# Altium PCB TP3_PCB.PcbDoc
Units mm, origin at the board's own origin, x right, y up, seen from the top; angles counter-clockwise.
Board outline 41.1 x 58.6 mm, 2 copper layers (Top Layer, Bottom Layer); 36 components, 23 nets, 142 pads, 38 vias.
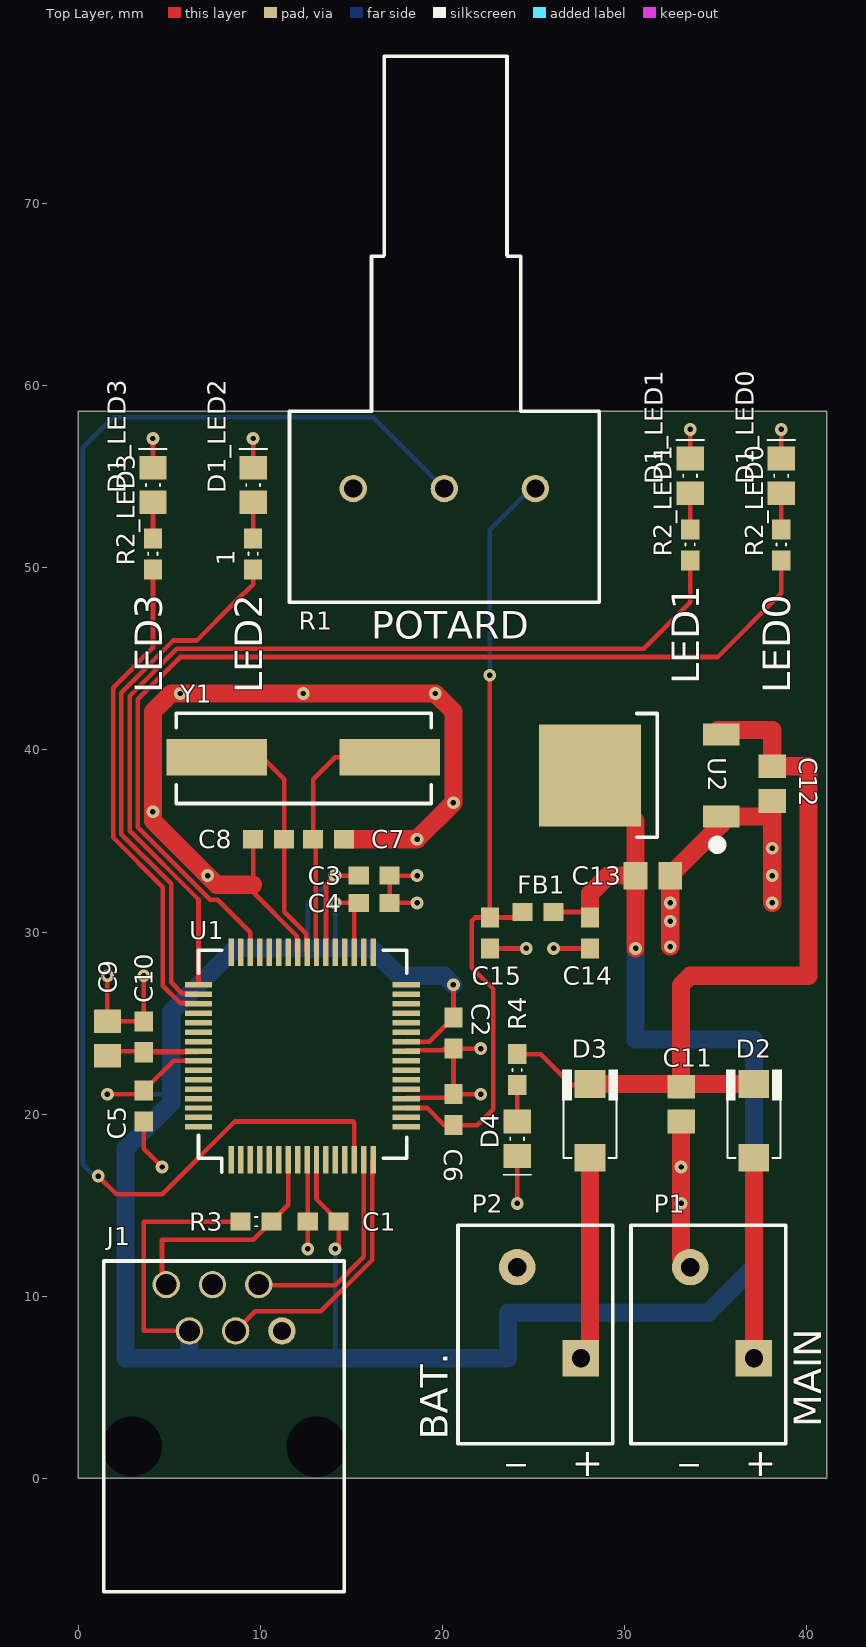
[diagram p0: Top Layer view]
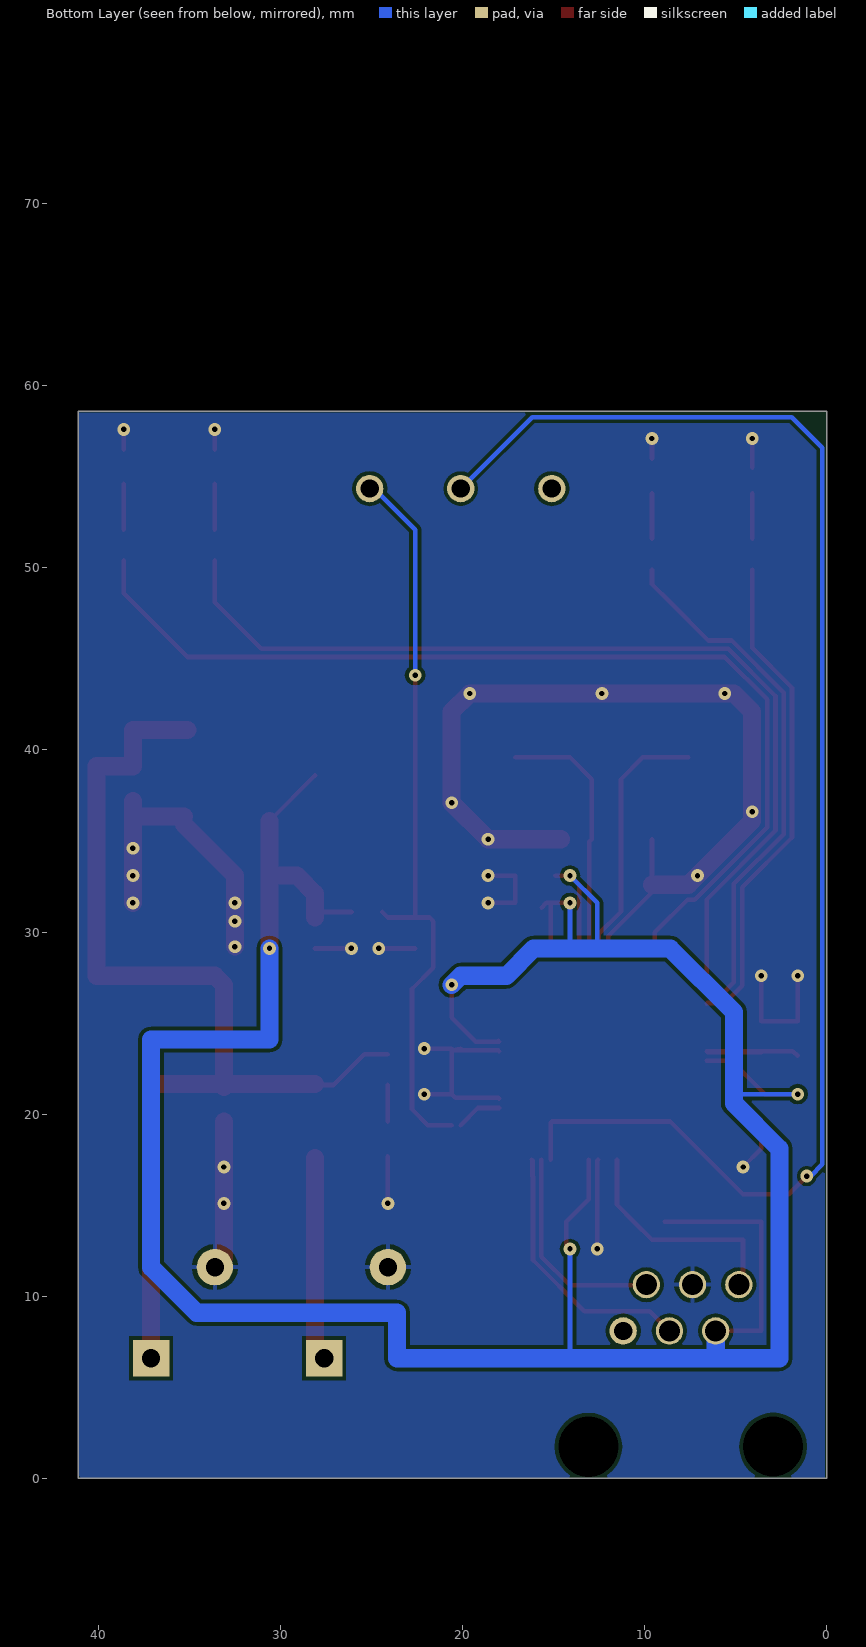
[diagram p1: Bottom Layer view, seen from below]

## Layer stack, top to bottom
Top Solder: solder mask 0.0102, Solder Resist, Dk 3.5
Top Layer: signal copper 0.0356
Dielectric 1: dielectric 0.32, FR-4, Dk 4.8
Bottom Layer: signal copper 0.0356
Bottom Solder: solder mask 0.0102, Solder Resist, Dk 3.5

## Board outline
0.2,0 41.1,0 41.1,58.6 0,58.6 0,0.2 0,0

## Design rules (kind name [scope] priority, off if disabled: settings)
Clearance [All] p1: gap=0.2
HoleSize [All] p1: absolutevalues=TRUE maxlimit=3 minlimit=0.3 maxpercent=80.000 minpercent=20.000
PolygonConnect isvia [IsVia] p1: connectstyle=Direct reliefconductorwidth=0.254 reliefentries=4 polygonreliefangle="90 Angle" airgapwidth=0.254
PolygonConnect all [All] p2: connectstyle=Relief reliefconductorwidth=0.254 reliefentries=4 polygonreliefangle="90 Angle" airgapwidth=0.254
RoutingVias [All] p1: holewidth=1 width=1 viastyle="Through Hole" minholewidth=0.3 minwidth=0.7 maxholewidth=3 maxwidth=3
SolderMaskExpansion [All] p1: expansion=0.102
UnpouredPolygon [All] p1: allowunpoured=FALSE
Width [All] p1: maxlimit=3 minlimit=0.2 preferedwidth=0.25
28 further rules are at their usual default settings.

## Classes and differential pairs
channel class led: LED0 LED1 LED2 LED3
component class TP2: R1
component class POWER: C11 C12 C13 C14 C15 D2 D3 D4 FB1 P1 P2 R4 U2
component class PIC: C1 C2 C3 C4 C5 C6 C7 C8 C9 C10 J1 R3 U1 Y1
component class LED3: D1_LED3 R2_LED3
component class LED2: 1 D1_LED2 R2_LED2
component class LED1: D1_LED1 R2_LED1
component class LED0: D1_LED0 R2_LED0

## Components (designator, comment, footprint, x,y, rotation, side; value= is the part's Value field where it differs from the comment)
1 "330r" RESC1608N 9.6,51.6 r270 top (schematic designator R2)
C1 "100nF" CAPC1608N 12.6,14.1 r0 top
C2 "100nF" CAPC1608N 20.6,23.6 r90 top
C3 "100nF" CAPC1608N 17.1,33.1 r180 top
C4 "100nF" CAPC1608N 17.1,31.6 r180 top
C5 "100nF" CAPC1608N 3.6,19.6 r90 top
C6 "100nF" CAPC1608N 20.6,21.1 r270 top
C7 "20pF" CAPC1608N 14.6,35.1 r180 top
C8 "20pF" CAPC1608N 9.6,35.1 r0 top
C9 "10uF 6.3V" CAPC2012N 1.6,25.1 r270 top
C10 "1uF 6.3V" CAPC1608N 3.6,25.1 r270 top
C11 "10uF 6.3V" CAPC2012N 33.1,19.6 r90 top
C12 "10uF 6.3V" CAPC2012N 38.1,39.1 r270 top
C13 "10uF 6.3V" CAPC2012N 30.6,33.1 r0 top
C14 "1uF 6.3V" CAPC1608N 28.1,29.1 r90 top
C15 "100nF" CAPC1608N 22.6,29.1 r90 top
D1_LED0 "Green LED" "LED 0805" 38.6,54.1 r90 top (schematic designator D1)
D1_LED1 "Green LED" "LED 0805" 33.6,54.1 r90 top (schematic designator D1)
D1_LED2 "Green LED" "LED 0805" 9.6,53.6 r90 top (schematic designator D1)
D1_LED3 "Green LED" "LED 0805" 4.1,53.6 r90 top (schematic designator D1)
D2 "GF1A" SMA/DO-214AC_21 37.1,17.6 r90 top
D3 "GF1A" SMA/DO-214AC_21 28.1,17.6 r90 top
D4 "Green LED" "LED 0805" 24.1,19.6 r270 top
FB1 "600r" INDC1608AN 26.1,31.1 r180 top
J1 "Program / Debug" RJ12_90 6.1,8.1 r0 top
P1 "12V Main" PHOENIX_1985195 37.1,6.6 r0 top
P2 "12V Battery" PHOENIX_1985195 27.6,6.6 r0 top
R1 "1K" PDB181-K415K-102A2 11.6,47.1 r0 top
R2_LED0 "330r" RESC1608N 38.6,52.1 r270 top (schematic designator R2)
R2_LED1 "330r" RESC1608N 33.6,52.1 r270 top (schematic designator R2)
R2_LED3 "330r" RESC1608N 4.1,51.6 r270 top (schematic designator R2)
R3 "4.7k" RESC1608N 10.6,14.1 r180 top
R4 "470r" RESC1608N 24.1,21.6 r90 top
U1 "PIC32MX764F128H-I/PT" QFP50P1200X1200X120-64 6.6,27.1 r0 top
U2 "AP1117" TD03B_N 28.1,38.6 r90 top
Y1 "8MHz" "HC49/4H SMX CRYSTAL" 17.1,39.6 r180 top

## Footprints (in the part's own frame and the unit in brackets; to place one, negate y for a bottom-side part, rotate by r counter-clockwise, add the part's x,y. Pads: shape width x height; smd on the part's side, far side on the other; paste and mask are expansions set on the pad)
CAPC1608N [mm]
  rect 1.1x1 smd: 1(0,0) 2(1.7,0)
CAPC2012N [mm]
  rect 1.3x1.5 smd: 1(0,0) 2(1.9,0)
"HC49/4H SMX CRYSTAL" [mm]
  rect 5.5x2 smd: 1(9.5,0) 2(0,0)
  silkscreen extent -2.29,-2.41 11.71,2.54
INDC1608AN [mm]
  rect 1.1x1 smd: 1(0,0) 2(1.7,0)
"LED 0805" [mm]
  rect 1.3x1.5 smd: 1(0,0) 2(1.9,0)
  silkscreen extent 0.89,-0.76 2.92,0.76
PDB181-K415K-102A2 [mm]
  round 1.5 hole 1: 1(13.5,7.25) 2(8.5,7.25) 3(3.5,7.25)
  silkscreen extent 0,1.02 17,30.99
PHOENIX_1985195 [mm]
  rect 2x2 hole 1: 1(0,0)
  round 2 hole 1: 2(-3.5,5)
  silkscreen extent -6.75,-4.7 1.75,7.3
QFP50P1200X1200X120-64 [mm]
  rect 0.3x1.5 smd: 1(1.8,-9.6) 2(2.32,-9.6) 3(2.84,-9.6) 4(3.36,-9.6) 5(3.88,-9.6) 6(4.4,-9.6) 7(4.92,-9.6) 8(5.44,-9.6) 9(5.96,-9.6) 10(6.48,-9.6) 11(7,-9.6) 12(7.52,-9.6) 13(8.04,-9.6) 14(8.56,-9.6) 15(9.08,-9.6) 16(9.6,-9.6) 33(9.6,1.8) 34(9.08,1.8) 35(8.56,1.8) 36(8.04,1.8) 37(7.52,1.8) 38(7,1.8) 39(6.48,1.8) 40(5.96,1.8) 41(5.44,1.8) 42(4.92,1.8) 43(4.4,1.8) 44(3.88,1.8) 45(3.36,1.8) 46(2.84,1.8) 47(2.32,1.8) 48(1.8,1.8)
  rect 1.5x0.3 smd: 17(11.4,-7.8) 18(11.4,-7.28) 19(11.4,-6.76) 20(11.4,-6.24) 21(11.4,-5.72) 22(11.4,-5.2) 23(11.4,-4.68) 24(11.4,-4.16) 25(11.4,-3.64) 26(11.4,-3.12) 27(11.4,-2.6) 28(11.4,-2.08) 29(11.4,-1.56) 30(11.4,-1.04) 31(11.4,-0.52) 32(11.4,0) 49(0,0) 50(0,-0.52) 51(0,-1.04) 52(0,-1.56) 53(0,-2.08) 54(0,-2.6) 55(0,-3.12) 56(0,-3.64) 57(0,-4.16) 58(0,-4.68) 59(0,-5.2) 60(0,-5.72) 61(0,-6.24) 62(0,-6.76) 63(0,-7.28) 64(0,-7.8)
  silkscreen extent 0,-10.29 11.43,1.91
RESC1608N [mm]
  rect 1.1x1 smd: 1(0,0) 2(1.7,0)
  silkscreen extent 0.76,-0.25 0.89,0.25
RJ12_90 [mm]
  round 1.5 hole 1.15: 1(-1.27,2.54) 2(0,0) 3(1.27,2.54) 4(2.54,0) 5(3.81,2.54)
  round 0 hole 3.3: 2(-3.15,-6.35) 2(6.99,-6.36)
  round 1.5 hole 1: 6(5.08,0)
  silkscreen extent -4.7,-14.32 8.51,3.84
SMA/DO-214AC_21 [mm]
  rect 1.52x1.68 smd: 1(0,0) 2(4.06,0)
  silkscreen extent 0,-1.52 4.83,1.52
TD03B_N [mm]
  rect 1.2x2 smd: 1(-2.25,-7.2) 3(2.25,-7.2)
  rect 5.6x5.6 smd: 4(0,0)
  silkscreen extent -4.19,-7.37 3.4,-2.57

## Part data
1 R2_LED0 R2_LED1 R2_LED3 R3 R4: library part Res1, "Resistor"
C1 C2 C3 C4 C5 C6 C7 C8 C9 C10 C11 C12 C13 C14 C15: library part Cap, "Capacitor"
D1_LED0 D1_LED1 D1_LED2 D1_LED3 D4: library part LED0, "Typical INFRARED GaAs LED"
D2 D3: library part Diode, "Default Diode"
FB1: library part Inductor, "Inductor"
J1: library part "Header 6", "Header, 6-Pin"
P1 P2: library part "Header 2", "Header, 2-Pin"
R1: library part "RPot SM", "Potentiometer"
U1: "PIC32MX764F128H"
U2: "1A LDO, 18V input, DPAK"
Y1: library part XTAL, "Crystal Oscillator"

## Via types
v1: diameter 0.7, hole 0.3, Top Layer to Bottom Layer, 38 vias

## Nets (pads, with @x,y where several pads share a name; then routed paths per layer and width w, separated by ;. In a path a pad name is that pad's centre, name@x,y a point inside that pad or via, vN(x,y) a via of type N, cw(c..) or ccw(c..) an arc to the next point about the centre after c; other vN are vias at no path point)
ALIM: D2.1 P1.1 | length 11
  Top Layer w1: P1.1 D2.1
BATTERY: D3.1 P2.1 | length 11.2
  Top Layer w0.254: P2.1 P2.1@28.1,7.1
  Top Layer w1: P2.1@28.1,7.1 D3.1
GND: C1.1 C2.1 C3.1 C4.1 C5.1 C6.1 C7.1 C8.1 C9.1 C10.1 C11.1 C12.2 C13.2 C14.1 C15.1 D1_LED0.2 D1_LED1.2 D1_LED2.2 D1_LED3.2 D4.2 J1.3 P1.2 P2.2 U1.9 U1.20 U1.25 U1.41 U2.1 | length 116.3
  Top Layer w0.254: v1(1.6,27.6) C9.1 C10.1 v1(3.6,27.6) ; C5.1 3.6,18.1 v1(4.6,17.1) ; D1_LED3.2 v1(4.1,57.1) ; C8.1 9.6,32.6 9.6,32.182 11.997,29.785 11.997,28.943 U1.41 ; D1_LED2.2@9.6,56 v1(9.6,57.1) ; U1.9 12.6,17.46 C1.1 v1(12.6,12.6) ; U1.20 18.043,20.903 20.403,20.903 C6.1 ; U1.25 18.043,23.503 C2.1@20.6,23.503 ; v1(18.6,31.6) C4.1 C3.1 v1(18.6,33.1) ; C2.1@20.1,23.6 20.582,23.507 C2.1@20.6,23.503 ; C6.1@20.6,21.095 C6.1 ; C2.1 v1(22.1,23.6) ; v1(22.1,21.1) C6.1 ; C15.1 v1(24.6,29.1) ; v1(24.1,15.1) D4.2 ; v1(26.1,29.1) C14.1 ; P1.2@33.1,12.1 P1.2 ; D1_LED1.2@33.6,56.5 v1(33.6,57.6) ; U2.1@35.3,35.9 U2.1 ; D1_LED0.2@38.6,56.5 v1(38.6,57.6) ; C6.1 C2.1@20.6,23.503
  Top Layer w1: 9.6,32.6 7.6,32.6 4.1,36.1 4.1,42.1 5.1,43.1 v1(19.6,43.1) 20.6,42.1 v1(20.6,37.1) v1(18.6,35.1) C7.1 ; v1(32.5,29.2) C13.2 U2.1@35.3,35.9 ; P1.2@33.1,12.1 C11.1 ; U2.1 38.1,36.35 ; v1(38.1,31.6) C12.2
  other v1: 33.1,15.1 33.1,17.1 32.5,30.6 32.5,31.6 7.1,33.1 38.1,33.1 38.1,34.6 4.1,36.6 5.6,43.1 12.35,43.1
LED0: R2_LED0.2 U1.46 | length 56.2
  Top Layer w0.254: U1.46 9.44,29.98 7.647,31.773 7.257,31.773 3.273,35.757 3.273,42.773 5.6,45.1 35.1,45.1 38.6,48.6 R2_LED0.2
LED1: R2_LED1.2 U1.49 | length 52.6
  Top Layer w0.254: U1.49 6.6,31.788 2.819,35.569 2.819,42.961 5.412,45.554 31.054,45.554 33.6,48.1 R2_LED1.2
LED2: 1.2 U1.50 | length 29.7
  Top Layer w0.254: U1.50 6.557,26.623 5.715,26.623 5.1,27.238 5.1,32.646 2.365,35.381 2.365,43.149 5.224,46.008 6.508,46.008 8.6,48.1 ; 8.35,47.85 8.6,48.1 ; 1.2 9.6,49.1 8.6,48.1
LED3: R2_LED3.2 U1.51 | length 27.3
  Top Layer w0.254: R2_LED3.2 4.1,45.6 1.911,43.411 1.911,35.193 4.646,32.458 4.646,27.049 5.593,26.103 6.557,26.103 U1.51
MCLR: J1.1 R3.1 U1.7 | length 12.8
  Top Layer w0.254: J1.1 4.6,10.87 4.6,13.1 9.6,13.1 R3.1 11.52,15.02 U1.7
NetC9_2: C9.2 C10.2 U1.56 | length 8.1
  Top Layer w0.254: C9.2 1.86,23.46 U1.56 6.557,23.417 3.6,23.417 C10.2
NetD1_LED0_1: D1_LED0.1 R2_LED0.1 | length 2.5
  Top Layer w0.254: R2_LED0.1 D1_LED0.1@38.6,54.6
NetD1_LED1_1: D1_LED1.1 R2_LED1.1 | length 2.5
  Top Layer w0.254: R2_LED1.1 D1_LED1.1@33.6,54.6
NetD1_LED2_1: 1.1 D1_LED2.1 | length 2.5
  Top Layer w0.254: 1.1 D1_LED2.1@9.6,54.1
NetD1_LED3_1: D1_LED3.1 R2_LED3.1 | length 2.5
  Top Layer w0.254: R2_LED3.1 D1_LED3.1@4.1,54.1
NetD4_1: D4.1 R4.1 | length 2
  Top Layer w0.254: D4.1 R4.1
NetR1_2: R1.2 U1.14 | length 80.8
  Top Layer w0.254: v1(1.1,16.6) 2.1,15.6 4.6,15.6 8.6,19.6 15.1,19.6 15.16,19.54 U1.14
  Bottom Layer w0.254: v1(1.1,16.6) 0.892,16.6 0.246,17.246 0.246,56.6 1.923,58.277 16.173,58.277 R1.2
PGC: J1.5 U1.15 | length 11.8
  Top Layer w0.254: J1.5 9.95,10.6 14.1,10.6 15.68,12.18 U1.15
PGD: J1.4 U1.16 | length 14.6
  Top Layer w0.254: J1.4 9.717,9.177 13.319,9.177 16.134,11.992 16.134,16.569 16.157,16.592 16.157,17.457 U1.16
V3P3: C1.2 C2.2 C3.2 C4.2 C5.2 C13.1 C14.2 FB1.1 J1.2@6.1,8.1 R3.2 U1.10 U1.26 U1.35 U1.38 U1.57 U2.4 | length 173.2
  Top Layer w0.254: v1(1.6,21.1) 3.4,21.1 C5.2 5.24,22.94 U1.57 ; J1.2@6.1,8.1 3.6,8.1 3.6,14.1 R3.2 ; U1.10 13.08,15.32 C1.2 v1@14.3,12.8 ; U1.38 13.6,32.6 v1(14.1,33.1) C3.2@14.9,33.1 ; v1(14.1,31.6) C4.2@15.16,31.6 ; U1.35 C4.2@15.16,31.6 ; C4.2@15.66,31.34 C4.2 C4.2@15.16,31.6 ; U1.26@18.043,24.023 U1.26 19.28,23.98 C2.2 v1(20.6,27.1) ; FB1.1 27.8,31.1 C14.2 ; U2.4 U2.4@30.6,36.1
  Top Layer w1: C14.2 28.1,32.1 29.1,33.1 C13.1 ; v1(30.6,29.1) C13.1 ; U2.4@30.6,36.1 C13.1
  Bottom Layer w0.254: v1(1.6,21.1) 4.6,21.1 ; 12.6,29.1 12.6,31.6 v1(14.1,33.1) ; 14.1,7.1 v1(14.1,12.6) ; 14.1,29.1 v1(14.1,31.6)
  Bottom Layer w1: J1.2@6.1,8.1 6.1,6.6 ; v1(20.6,27.1) 20.1,27.6 17.6,27.6 16.1,29.1 14.1,29.1 12.6,29.1 8.6,29.1 5.1,25.6 5.1,20.6 2.6,18.1 2.6,6.6 6.1,6.6 ; v1(30.6,29.1) 30.6,24.1 37.1,24.1 37.1,11.6 34.6,9.1 23.6,9.1 23.6,6.6 6.1,6.6
V3P3A: C6.2 C15.2 FB1.2 R1.1 U1.19 | length 43.6
  Top Layer w0.254: U1.19 19.16,20.34 C6.2@20.1,19.4 ; C6.2 21.9,19.4 22.777,20.277 22.777,26.873 21.6,28.05 21.6,30.6 21.8,30.8 C15.2 ; v1(22.6,44.1) C15.2 ; FB1.2 24.1,30.8 C15.2
  Bottom Layer w0.254: v1(22.6,44.1) 22.6,52.1 24.85,54.35 R1.1
V5: C11.2 C12.1 D2.2 D3.2 R4.2 U2.3 | length 45
  Top Layer w0.254: R4.2 25.4,23.3 27.1,21.6 28.04,21.6 D3.2
  Top Layer w1: D3.2 C11.2@33.1,21.66 ; C11.2 C11.2@33.1,21.66 ; U2.3@35.1,41.1 38.1,41.1 C12.1 40.1,39.1 40.1,27.6 33.6,27.6 33.1,27.1 C11.2@33.1,21.66 ; D2.2 C11.2@33.1,21.66
VCC: R1.3
X1: C7.2 U1.39 Y1.2 | length 14.3
  Top Layer w0.254: U1.39 13.037,28.943 13.037,34.963 C7.2 12.9,38.4 14.1,39.6 Y1.2
X2: C8.2 U1.40 Y1.1 | length 14.2
  Top Layer w0.254: Y1.1 10.1,39.6 11.3,38.4 C8.2 11.3,31.124 12.517,29.908 12.517,28.943 U1.40
pads on no net: J1.2@2.95,1.75 J1.2@13.09,1.74 J1.6 U1.1 U1.2 U1.3 U1.4 U1.5 U1.6 U1.8 U1.11 U1.12 U1.13 U1.17 U1.18 U1.21 U1.22 U1.23 U1.24 U1.27 U1.28 U1.29 U1.30 U1.31 U1.32 U1.33 U1.34 U1.36 U1.37 U1.42 U1.43 U1.44 U1.45 U1.47 U1.48 U1.52 U1.53 U1.54 U1.55 U1.58 U1.59 U1.60 U1.61 U1.62 U1.63 U1.64

## Polygon pours and split planes (outlines as drawn)
GND on Bottom Layer "gnd plan" (solid, remove dead copper, pour order 16): 0.1,0.05 41.05,0.05 41.05,58.525 0.1,58.525

## Silkscreen, mask and mechanical layers (free items; w line width, h text height)
Top Overlay:
  text "POTARD" at 16.1,46.1 h1.52
  text "LED1" at 34.1,43.6 h1.52 r90
  text "LED3" at 4.6,43.1 h1.52 r90
  text "LED2" at 10.1,43.1 h1.52 r90
  text "LED0" at 39.1,43.1 h1.52 r90
  text "MAIN" at 40.8,2.8 h1.52 r90
  text "BAT." at 20.3,2.125 h1.52 r90
Drill Drawing:
  lines w0.025: 48.005,18.623 49.275,18.623 48.64,17.353 48.005,18.623 ; 48.005,21.163 49.275,21.163 49.275,22.433 48.005,22.433 48.005,21.163 ; 48.005,24.973 48.64,25.291 49.275,24.973 48.958,25.608 49.275,26.243 48.64,25.926 48.005,26.243 48.323,25.608 48.005,24.973 ; 48.005,28.783 48.005,29.101 48.323,29.418 48.005,29.736 48.005,30.053 48.323,30.053 48.64,29.736 48.958,30.053 49.275,30.053 49.275,29.736 48.958,29.418 49.275,29.101 49.275,28.783 48.958,28.783 48.64,29.101 48.323,28.783 48.005,28.783
  lines w0.254: -2,0 -2,58.5 ; 0,-2 41,-2
  lines w0.381: 46.275,16.21 144.801,16.21 ; 46.275,31.45 144.801,31.45 ; 60.267,12.4 60.267,35.26 ; 77.992,12.4 77.992,35.26 ; 112.17,12.4 112.17,35.26 ; 125.019,12.4 125.019,35.26 ; 46.275,12.4 144.801,12.4 144.801,35.26 46.275,35.26 46.275,12.4
  text "Symbol" at 48.561,32.593 h1.83
  text "Hit Count" at 61.41,32.593 h1.83
  text "Finished Hole Size" at 79.135,32.593 h1.83
  text "Plated" at 113.313,32.593 h1.83
  text "Hole Type" at 126.162,32.593 h1.83
  text "58.50 mm" at -2.875,30.2 h1.52 r90
  text "2" at 61.41,28.783 h1.52
  text "3.300mm (129.92mil)" at 79.135,28.783 h1.52
  text "PTH" at 113.313,28.783 h1.52
  text "Round" at 126.162,28.783 h1.52
  text "5" at 61.41,24.973 h1.52
  text "1.150mm (45.28mil)" at 79.135,24.973 h1.52
  text "PTH" at 113.313,24.973 h1.52
  text "Round" at 126.162,24.973 h1.52
  text "8" at 61.41,21.163 h1.52
  text "1.000mm (39.37mil)" at 79.135,21.163 h1.52
  text "PTH" at 113.313,21.163 h1.52
  text "Round" at 126.162,21.163 h1.52
  text "38" at 61.41,17.353 h1.52
  text "0.300mm (11.81mil)" at 79.135,17.353 h1.52
  text "PTH" at 113.313,17.353 h1.52
  text "Round" at 126.162,17.353 h1.52
  text "53 Total" at 61.41,13.543 h1.52
  text "41.00 mm" at 14.25,-4.4 h1.52
Mechanical 32:
  lines w0.254: 0,0 0,58.6 41.1,58.6 41.1,0 0,0

## Text inside footprints (layer, text, board x,y; h text height)
P1: Top Overlay "_" at 33.036,1.139 h1.52; Top Overlay "+" at 36.592,0.123 h1.52
P2: Top Overlay "_" at 23.536,1.139 h1.52; Top Overlay "+" at 27.092,0.123 h1.52